# EAGLE board CT_schematic (EAGLE 7.6.0)

Size 100 x 80 mm. Coordinates in mm from the lower left corner, seen from the top.
Outline: 0,0 100,0 100,80 0,80 0,0
Copper layers (1*16): Top 0.035mm / dielectric 1.5mm / Bottom 0.035mm
Design rules "default": minimum track width 10mil, minimum drill 24mil, track to track 8mil, track to pad 8mil, pad to pad 8mil, via to via 8mil, smd to smd 8mil, copper to edge 40mil, drill to drill 8mil, minimum pad ring 10mil, minimum via ring 8mil, stop-mask expansion 4mil, vias tented up to drill 0mil, thermal gap 10mil

## Footprints (pad centres in the part's own frame; a part is rotated, then mirrored left to right if it is on the bottom)
C0603 = smd 0.8 x 0.8: 1 -0.762,0; 2 0.762,0
C0402 = smd 0.5 x 0.5: 1 -0.508,0; 2 0.508,0
C1210 = smd 1.2 x 2.5: 1 -1.524,0; 2 1.524,0
C0805 = smd 1.2 x 1.3: 1 -1.016,0; 2 1.016,0
EXV-9B = smd 2.718 x 1.778: 1 -2.108,0; 2 2.108,0
R0603 = smd 0.8 x 0.8: 1 -0.762,0; 2 0.762,0
EXV-9H = smd 3.505 x 1.676: 1 -2.857,0; 2 2.857,0
L0603 = smd 0.8 x 0.8: 1 -0.762,0; 2 0.762,0
PJ-037B_PACKAGE = drill 3.7 square: 1 12,0 | drill 3.2 square: 2 6,0
UFBGA169 = smd 0.35 x 0.35: A1 -3.9,3.9; A2 -3.25,3.9; A3 -2.6,3.9; A4 -1.95,3.9; A5 -1.3,3.9; A6 -0.65,3.9; A7 0,3.9; A8 0.65,3.9; A9 1.3,3.9; A10 1.95,3.9; A11 2.6,3.9; A12 3.25,3.9; A13 3.9,3.9; B1 -3.9,3.25; B2 -3.25,3.25; B3 -2.6,3.25; B4 -1.95,3.25; B5 -1.3,3.25; B6 -0.65,3.25; B7 0,3.25; B8 0.65,3.25; B9 1.3,3.25; B10 1.95,3.25; B11 2.6,3.25; B12 3.25,3.25; B13 3.9,3.25; C1 -3.9,2.6; C2 -3.25,2.6; C3 -2.6,2.6; C4 -1.95,2.6; C5 -1.3,2.6; C6 -0.65,2.6; C7 0,2.6; C8 0.65,2.6; C9 1.3,2.6; C10 1.95,2.6; C11 2.6,2.6; C12 3.25,2.6; C13 3.9,2.6; D1 -3.9,1.95; D2 -3.25,1.95; D3 -2.6,1.95; D4 -1.95,1.95; D5 -1.3,1.95; D6 -0.65,1.95; D7 0,1.95; D8 0.65,1.95; D9 1.3,1.95; D10 1.95,1.95; D11 2.6,1.95; D12 3.25,1.95; D13 3.9,1.95; E1 -3.9,1.3; E2 -3.25,1.3; E3 -2.6,1.3; E4 -1.95,1.3; E5 -1.3,1.3; E6 -0.65,1.3; E7 0,1.3; E8 0.65,1.3; E9 1.3,1.3; E10 1.95,1.3; E11 2.6,1.3; E12 3.25,1.3; E13 3.9,1.3; F1 -3.9,0.65; F2 -3.25,0.65; F3 -2.6,0.65; F4 -1.95,0.65; F5 -1.3,0.65; F6 -0.65,0.65; F7 0,0.65; F8 0.65,0.65; F9 1.3,0.65; F10 1.95,0.65; F11 2.6,0.65; F12 3.25,0.65; F13 3.9,0.65; G1 -3.9,0; G2 -3.25,0; G3 -2.6,0; G4 -1.95,0; G5 -1.3,0; G6 -0.65,0; G7 0,0; G8 0.65,0; G9 1.3,0; G10 1.95,0; G11 2.6,0; G12 3.25,0; G13 3.9,0; H1 -3.9,-0.65; H2 -3.25,-0.65; H3 -2.6,-0.65; H4 -1.95,-0.65; H5 -1.3,-0.65; H6 -0.65,-0.65; H7 0,-0.65; H8 0.65,-0.65; H9 1.3,-0.65; H10 1.95,-0.65; H11 2.6,-0.65; H12 3.25,-0.65; H13 3.9,-0.65; J1 -3.9,-1.3; J2 -3.25,-1.3; J3 -2.6,-1.3; J4 -1.95,-1.3; J5 -1.3,-1.3; J6 -0.65,-1.3; J7 0,-1.3; J8 0.65,-1.3; J9 1.3,-1.3; J10 1.95,-1.3; J11 2.6,-1.3; J12 3.25,-1.3; J13 3.9,-1.3; K1 -3.9,-1.95; K2 -3.25,-1.95; K3 -2.6,-1.95; K4 -1.95,-1.95; K5 -1.3,-1.95; K6 -0.65,-1.95; K7 0,-1.95; K8 0.65,-1.95; K9 1.3,-1.95; K10 1.95,-1.95; K11 2.6,-1.95; K12 3.25,-1.95; K13 3.9,-1.95; L1 -3.9,-2.6; L2 -3.25,-2.6; L3 -2.6,-2.6; L4 -1.95,-2.6; L5 -1.3,-2.6; L6 -0.65,-2.6; L7 0,-2.6; L8 0.65,-2.6; L9 1.3,-2.6; L10 1.95,-2.6; L11 2.6,-2.6; L12 3.25,-2.6; L13 3.9,-2.6; M1 -3.9,-3.25; M2 -3.25,-3.25; M3 -2.6,-3.25; M4 -1.95,-3.25; M5 -1.3,-3.25; M6 -0.65,-3.25; M7 0,-3.25; M8 0.65,-3.25; M9 1.3,-3.25; M10 1.95,-3.25; M11 2.6,-3.25; M12 3.25,-3.25; M13 3.9,-3.25; N1 -3.9,-3.9; N2 -3.25,-3.9; N3 -2.6,-3.9; N4 -1.95,-3.9; N5 -1.3,-3.9; N6 -0.65,-3.9; N7 0,-3.9; N8 0.65,-3.9; N9 1.3,-3.9; N10 1.95,-3.9; N11 2.6,-3.9; N12 3.25,-3.9; N13 3.9,-3.9
M10382 = smd 1 x 1: 1 0,0; 2 -1.6,0; 3 -3.2,0; 4 -3.2,-2; 5 -3.2,-3.6; 6 -3.2,-5.2; 7 -3.2,-6.8; 8 -3.2,-8.4; 9 -3.2,-10; 10 -3.2,-11.6; 11 -3.2,-13.2; 12 -3.2,-14.8; 13 -3.2,-16.4; 14 -3.2,-18; 15 -3.2,-19.6; 16 -3.2,-21.2; 17 -3.2,-22.8; 18 -0.55,-22.8; 19 1.05,-22.8; 20 2.65,-22.8; 21 5.3,-22.8; 22 5.3,-21.2; 23 5.3,-19.6; 24 5.3,-18; 25 5.3,-16.4; 26 5.3,-14.8; 27 5.3,-13.2; 28 5.3,-11.6; 29 5.3,-10; 30 5.3,-8.4; 31 5.3,-6.8; 32 5.3,-5.2; 33 5.3,-3.6; 34 5.3,-2; 35 5.3,0; 36 3.7,0
SOIC-8 = smd 1.6 x 0.6: 1 -2.7,1.905 | smd 1.55 x 0.6: 2 -2.7,0.635; 3 -2.7,-0.635; 4 -2.7,-1.905; 5 2.7,-1.905; 6 2.7,-0.635; 7 2.7,0.635; 8 2.7,1.905
182-009-MALE = drill 1.194 pad 1.524 octagon: 1 -5.537,10.923; 2 -2.769,10.923; 3 0,10.923; 4 2.769,10.923; 5 5.537,10.923; 6 -4.153,8.08; 7 -1.384,8.08; 8 1.384,8.08; 9 4.153,8.08 | hole 3.048: -12.446,9.501; 12.446,9.501
PC28F512P33BFD = smd 0.45 x 0.45: A1 0,0; A2 1,0; A3 2,0; A4 3,0; A5 4,0; A6 5,0; A7 6,0; A8 7,0; B1 0,-1; B2 1,-1; B3 2,-1; B4 3,-1; B5 4,-1; B6 5,-1; B7 6,-1; B8 7,-1; C1 0,-2; C2 1,-2; C3 2,-2; C4 3,-2; C5 4,-2; C6 5,-2; C7 6,-2; C8 7,-2; D1 0,-3; D2 1,-3; D3 2,-3; D4 3,-3; D5 4,-3; D6 5,-3; D7 6,-3; D8 7,-3; E1 0,-4; E2 1,-4; E3 2,-4; E4 3,-4; E5 4,-4; E6 5,-4; E7 6,-4; E8 7,-4; F1 0,-5; F2 1,-5; F3 2,-5; F4 3,-5; F5 4,-5; F6 5,-5; F7 6,-5; F8 7,-5; G1 0,-6; G2 1,-6; G3 2,-6; G4 3,-6; G5 4,-6; G6 5,-6; G7 6,-6; G8 7,-6; H1 0,-7; H2 1,-7; H3 2,-7; H4 3,-7; H5 4,-7; H6 5,-7; H7 6,-7; H8 7,-7
QFN-24 = smd 0.7 x 0.305: 1 -1.815,1.25; 2 -1.815,0.75; 3 -1.815,0.25; 4 -1.815,-0.25; 5 -1.815,-0.73; 6 -1.815,-1.25; 13 1.815,-1.25; 14 1.815,-0.75; 15 1.815,-0.25; 16 1.815,0.25; 17 1.815,0.75; 18 1.815,1.25 | smd 0.305 x 0.7: 7 -1.25,-1.815; 8 -0.75,-1.815; 9 -0.25,-1.815; 10 0.25,-1.815; 11 0.75,-1.815; 12 1.25,-1.815; 19 1.25,1.815; 20 0.75,1.815; 21 0.25,1.815; 22 -0.25,1.815; 23 -0.75,1.815; 24 -1.25,1.815 | smd 2.591 x 2.591: 25 0,0
FCI_10118193-0001LF = smd 0.4 x 1.35: 1 -1.3,2.675; 2 -0.65,2.675; 3 0,2.675; 4 0.65,2.675; 5 1.3,2.675 | smd 1.6 x 1.4: 6 -3.2,2.45; 7 3.2,2.45 | smd 1.9 x 1.9: 8 -1.2,0; 9 1.2,0 | hole 0.5: -3.3,0; 3.3,0
SOT143B = smd 1 x 0.7: 1 -0.75,-1 | smd 0.6 x 0.7: 2 0.95,-1; 3 0.95,1; 4 -0.95,1
QFN-28 = smd 0.813 x 0.305: 1 -2.451,1.5; 2 -2.451,1; 3 -2.451,0.5; 4 -2.451,0; 5 -2.451,-0.5; 6 -2.451,-1; 7 -2.451,-1.5; 15 2.451,-1.5; 16 2.451,-1; 17 2.451,-0.5; 18 2.451,0; 19 2.451,0.5; 20 2.451,1; 21 2.451,1.5 | smd 0.305 x 0.813: 8 -1.5,-2.451; 9 -1,-2.451; 10 -0.5,-2.451; 11 0,-2.451; 12 0.5,-2.451; 13 1,-2.451; 14 1.5,-2.451; 22 1.5,2.451; 23 1,2.451; 24 0.5,2.451; 25 0,2.451; 26 -0.5,2.451; 27 -1,2.451; 28 -1.5,2.451 | smd 3.607 x 3.607: 29 0,0
SJ-43515TS-SMT-TR = smd 2.2 x 3: 1 0.6,-7.4; 4 3.4,-7.4 | smd 3 x 3: 2 12.8,-7.4; 5 17,-3 | smd 2 x 3: 3 5.3,0; 6 2.5,0 | drill 1.8: P$7 4.5,-3.69; P$8 11.54,-3.69
ABLS-25.000MHZ-B2F-T = smd 5.6 x 2.8: 1 -3.81,0; 2 5.69,0
ABLS-12.288MHZ-B4-T = smd 5.6 x 2.8: 1 -3.81,0; 2 5.69,0
ASEK = smd 1.4 x 1: 1 -1.1,-0.8; 2 1.1,-0.8; 3 1.1,0.8; 4 -1.1,0.8
ASFL1 = smd 1.7 x 1.5: 1 -1.27,-1.1; 2 1.27,-1.1; 3 1.27,1.1; 4 -1.27,1.1
LP2954 = smd 1.6 x 0.6: 1 -2.475,1.905 | smd 1.55 x 0.6: 2 -2.475,0.635; 3 -2.475,-0.635; 4 -2.475,-1.905; 5 2.475,-1.905; 6 2.475,-0.635; 7 2.475,0.635; 8 2.475,1.905
WSON-8 = smd 0.3 x 0.6: 1 -0.75,0; 2 0.05,0; 3 0.85,0; 4 1.65,0; 5 1.65,3.8; 6 0.85,3.8; 7 0.05,3.8; 8 -0.75,3.8 | smd 3 x 2.6: PAD 0.45,1.9
SON-6 = smd 0.55 x 0.3: 1 -0.355,0.5 | smd 0.52 x 0.3: 2 -0.37,0; 3 -0.37,-0.5; 4 0.37,-0.5; 5 0.37,0; 6 0.37,0.5
SW_4-1437565-2 = smd 1.4 x 2.1: 1 -2.23,4.55; 2 -2.23,-4.55; 3 2.23,4.55; 4 2.23,-4.55
LGM67K-G1J2-24-Z = smd 0.8 x 1.4: A -2,0; C 0,0
NC7SZ125M5X = smd 1.3 x 0.7: 1 -1.3,0.95; 2 -1.3,0; 3 -1.3,-0.95; 4 1.3,-0.95; 5 1.3,0.95

## Placement (x,y rotation side)
C1  1e-06  [C0603]  -30.48,91.44 0 top  (outside the outline)
C2  1e-07  [C0603]  -34.29,91.44 0 top  (outside the outline)
C3  1e-07  [C0603]  -38.1,91.44 0 top  (outside the outline)
C4  1e-07  [C0603]  -41.91,91.44 0 top  (outside the outline)
C5  1e-07  [C0603]  -45.72,91.44 0 top  (outside the outline)
C6  1e-07  [C0603]  -49.53,91.44 0 top  (outside the outline)
C7  1e-07  [C0603]  -53.34,91.44 0 top  (outside the outline)
C8  1e-07  [C0603]  -57.15,91.44 0 top  (outside the outline)
C9  1e-07  [C0603]  -60.96,91.44 0 top  (outside the outline)
C10  1e-07  [C0603]  -64.77,91.44 0 top  (outside the outline)
C11  1e-07  [C0603]  -68.58,91.44 0 top  (outside the outline)
C12  1e-07  [C0603]  -72.39,91.44 0 top  (outside the outline)
C13  1e-07  [C0603]  -76.2,91.44 0 top  (outside the outline)
C14  1e-07  [C0603]  -80.01,91.44 0 top  (outside the outline)
C15  1e-07  [C0603]  -83.82,91.44 0 top  (outside the outline)
C16  1e-07  [C0603]  -87.63,91.44 0 top  (outside the outline)
C17  4.7e-06  [C0603]  -15.24,91.44 0 top  (outside the outline)
C18  2.2e-06  [C0603]  -19.05,91.44 0 top  (outside the outline)
C19  2.2e-06  [C0603]  -22.86,91.44 0 top  (outside the outline)
C20  1e-08  [C0603]  -91.44,91.44 0 top  (outside the outline)
C21  1e-06  [C0603]  -15.24,96.52 0 top  (outside the outline)
C22  1e-07  [C0603]  -19.05,96.52 0 top  (outside the outline)
C23  1e-11  [C0402]  -22.86,101.6 0 top  (outside the outline)
C24  1e-11  [C0402]  -26.67,101.6 0 top  (outside the outline)
C25  2.2e-11  [C0402]  -88.9,96.52 0 top  (outside the outline)
C26  2.2e-11  [C0402]  -92.71,96.52 0 top  (outside the outline)
C27  1e-06  [C0603]  -22.86,96.52 0 top  (outside the outline)
C28  1e-06  [C0603]  -26.67,96.52 0 top  (outside the outline)
C29  1e-07  [C0402]  -30.48,101.6 0 top  (outside the outline)
C30  1e-08  [C0402]  -34.29,101.6 0 top  (outside the outline)
C31  1e-07  [C0402]  -38.1,101.6 0 top  (outside the outline)
C32  1e-08  [C0402]  -41.91,101.6 0 top  (outside the outline)
C33  1e-07  [C0402]  -45.72,101.6 0 top  (outside the outline)
C34  1e-08  [C0402]  -49.53,101.6 0 top  (outside the outline)
C35  1e-08  [C0402]  -53.34,101.6 0 top  (outside the outline)
C36  2.2e-06  [C0603]  -26.67,91.44 0 top  (outside the outline)
C37  1e-08  [C0402]  -57.15,101.6 0 top  (outside the outline)
C38  1e-08  [C0402]  -60.96,101.6 0 top  (outside the outline)
C39  1e-06  [C0603]  -30.48,96.52 0 top  (outside the outline)
C40  2.2e-05  [C1210]  -45.72,74.93 0 top  (outside the outline)
C41  2.2e-05  [C1210]  -52.07,74.93 0 top  (outside the outline)
C42  1e-09  [C0402]  -64.77,101.6 0 top  (outside the outline)
C43  1e-09  [C0402]  -68.58,101.6 0 top  (outside the outline)
C44  1e-07  [C0402]  -72.39,101.6 0 top  (outside the outline)
C45  1e-07  [C0402]  -76.2,101.6 0 top  (outside the outline)
C46  1e-07  [C0402]  -80.01,101.6 0 top  (outside the outline)
C47  1e-07  [C0402]  -83.82,101.6 0 top  (outside the outline)
C48  1e-07  [C0402]  -87.63,101.6 0 top  (outside the outline)
C49  1e-05  [C0805]  -34.29,81.28 0 top  (outside the outline)
C50  1e-05  [C0805]  -39.37,81.28 0 top  (outside the outline)
C51  1e-05  [C0805]  -44.45,81.28 0 top  (outside the outline)
C52  1e-05  [C0805]  -49.53,81.28 0 top  (outside the outline)
C53  1e-05  [C0805]  -54.61,81.28 0 top  (outside the outline)
C54  2.2e-11  [C0402]  -15.24,101.6 0 top  (outside the outline)
C55  2.2e-11  [C0402]  -19.05,101.6 0 top  (outside the outline)
C56  1e-08  [C0402]  -91.44,101.6 0 top  (outside the outline)
C57  1e-08  [C0402]  -15.24,106.68 0 top  (outside the outline)
C58  1e-06  [EXV-9B]  -78.74,73.66 0 top  (outside the outline)
C59  2.2e-06  [EXV-9B]  -87.63,73.66 0 top  (outside the outline)
C60  1e-08  [C0402]  -19.05,106.68 0 top  (outside the outline)
C61  1e-05  [C1210]  -58.42,74.93 0 top  (outside the outline)
C62  1e-05  [C1210]  -64.77,74.93 0 top  (outside the outline)
C63  8e-07  [R0603]  -34.29,96.52 0 top  (outside the outline)
C64  1e-05  [C1210]  -71.12,74.93 0 top  (outside the outline)
C65  1e-07  [C0402]  -22.86,106.68 0 top  (outside the outline)
C66  0.0001  [EXV-9H]  -38.1,67.31 0 top  (outside the outline)
C67  0.0001  [EXV-9H]  -49.53,67.31 0 top  (outside the outline)
C68  1e-08  [C0402]  -26.67,106.68 0 top  (outside the outline)
C69  1e-08  [C0402]  -30.48,106.68 0 top  (outside the outline)
C70  1e-08  [C0402]  -34.29,106.68 0 top  (outside the outline)
F1  240.0  [L0603]  -38.1,96.52 0 top  (outside the outline)
J1  PJ-037B  [PJ-037B_PACKAGE]  -83.82,33.02 0 top  (outside the outline)
R2  1000.0  [R0603]  -41.91,96.52 0 top  (outside the outline)
R4  4700.0  [R0603]  -45.72,96.52 0 top  (outside the outline)
R5  4700.0  [R0603]  -49.53,96.52 0 top  (outside the outline)
R6  4700.0  [R0603]  -53.34,96.52 0 top  (outside the outline)
R7  2200.0  [R0603]  -57.15,96.52 0 top  (outside the outline)
R8  2200.0  [R0603]  -60.96,96.52 0 top  (outside the outline)
R9  10000.0  [R0603]  -25.4,86.36 0 top  (outside the outline)
R10  10000.0  [R0603]  -30.48,86.36 0 top  (outside the outline)
R11  10000.0  [R0603]  -35.56,86.36 0 top  (outside the outline)
R12  120.0  [R0603]  -64.77,96.52 0 top  (outside the outline)
R13  10000.0  [R0603]  -40.64,86.36 0 top  (outside the outline)
R14  10000.0  [R0603]  -45.72,86.36 0 top  (outside the outline)
R15  10000.0  [R0603]  -50.8,86.36 0 top  (outside the outline)
R16  10000.0  [R0603]  -55.88,86.36 0 top  (outside the outline)
R17  10000.0  [R0603]  -60.96,86.36 0 top  (outside the outline)
R18  8060.0  [R0603]  -68.58,96.52 0 top  (outside the outline)
R19  47000.0  [R0603]  -66.04,86.36 0 top  (outside the outline)
R20  47000.0  [R0603]  -71.12,86.36 0 top  (outside the outline)
R21  47000.0  [R0603]  -76.2,86.36 0 top  (outside the outline)
R22  680.0  [R0603]  -72.39,96.52 0 top  (outside the outline)
R23  100000.0  [R0603]  -59.69,81.28 0 top  (outside the outline)
R24  100000.0  [R0603]  -64.77,81.28 0 top  (outside the outline)
R25  47000.0  [R0603]  -81.28,86.36 0 top  (outside the outline)
R26  100000.0  [R0603]  -69.85,81.28 0 top  (outside the outline)
R27  100000.0  [R0603]  -74.93,81.28 0 top  (outside the outline)
R28  2231.0  [R0603]  -76.2,96.52 0 top  (outside the outline)
R29  1000.0  [R0603]  -80.01,96.52 0 top  (outside the outline)
R30  100000.0  [R0603]  -80.01,81.28 0 top  (outside the outline)
R31  300000.0  [R0603]  -85.09,81.28 0 top  (outside the outline)
R32  100000.0  [R0603]  -90.17,81.28 0 top  (outside the outline)
R33  10000.0  [R0603]  -86.36,86.36 0 top  (outside the outline)
R34  10000.0  [R0603]  -91.44,86.36 0 top  (outside the outline)
R35  9100.0  [R0603]  -83.82,96.52 0 top  (outside the outline)
R36  680000.0  [R0603]  -15.24,86.36 0 top  (outside the outline)
R37  120000.0  [R0603]  -20.32,86.36 0 top  (outside the outline)
U1  STM32F469AGH6  [UFBGA169]  -73.66,7.62 0 top  (outside the outline)
U2  M10382  [M10382]  -19.05,24.13 0 top  (outside the outline)
U3  MCP2562-E/SN  [SOIC-8]  -74.93,45.72 0 top  (outside the outline)
U4  182-009-113R531  [182-009-MALE]  -46.99,6.35 0 top  (outside the outline)
U5  PC28F512P33BFD  [PC28F512P33BFD]  -27.94,50.8 0 top  (outside the outline)
U6  USB3317C-CP-TR  [QFN-24]  -38.1,74.93 0 top  (outside the outline)
U7  10118193-0001LF  [FCI_10118193-0001LF]  -73.66,57.15 0 top  (outside the outline)
U8  prtr5v0u2ax  [SOT143B]  -46.99,106.68 0 top  (outside the outline)
U9  WM8731CLSEFL  [QFN-28]  -30.48,74.93 0 top  (outside the outline)
U10  SJ-43515TS-SMT-TR  [SJ-43515TS-SMT-TR]  -39.37,35.56 0 top  (outside the outline)
U11  SJ-43515TS-SMT-TR  [SJ-43515TS-SMT-TR]  -67.31,35.56 0 top  (outside the outline)
U12  ABLS-25.000MHZ-B2F-T  [ABLS-25.000MHZ-B2F-T]  -68.58,67.31 0 top  (outside the outline)
U13  ABLS-12.288MHZ-B4-T  [ABLS-12.288MHZ-B4-T]  -88.9,67.31 0 top  (outside the outline)
U14  ASEK-32.768KHz-ECST  [ASEK]  -29.21,67.31 0 top  (outside the outline)
U15  ASFL1-26MHZ-NCS  [ASFL1]  -64.77,58.42 0 top  (outside the outline)
U16  LP2954AIMX/NOPB  [LP2954]  -60.96,45.72 0 top  (outside the outline)
U17  LP3878SDX-ADJ/NOPB  [WSON-8]  -30.48,55.88 0 top  (outside the outline)
U18  LP2951ACSDX/NOPB  [WSON-8]  -48.26,55.88 0 top  (outside the outline)
U19  TPS3895ADRYR  [SON-6]  -50.8,105.41 0 top  (outside the outline)
U20  4-1437565-2  [SW_4-1437565-2]  -44.45,46.99 0 top  (outside the outline)
U21  Q65110A2395  [LGM67K-G1J2-24-Z]  -17.78,74.93 0 top  (outside the outline)
U22  nc7sz125m5x  [NC7SZ125M5X]  -15.24,80.01 0 top  (outside the outline)
U23  nc7sz125m5x  [NC7SZ125M5X]  -21.59,80.01 0 top  (outside the outline)
U24  nc7sz125m5x  [NC7SZ125M5X]  -27.94,80.01 0 top  (outside the outline)

## Library data of the parts
C1-C70 F1 J1 R2 R4-R37 U1-U24 = circuit_tree

## Nets
CLK_CRYSTAL_U1_G1: C23.1 U1.G1 U12.1
CLK_CRYSTAL_U1_G2: C24.1 U1.G2 U12.2
CLK_CRYSTAL_U9_1: C54.1 U9.1 U13.1
CLK_CRYSTAL_U9_2: C55.1 U9.2 U13.2
CLK_U1_E1: U1.E1 U14.3
CLK_U6_23: U6.23 U15.3
GND: C1.2 C2.2 C3.2 C4.2 C5.2 C6.2 C7.2 C8.2 C9.2 C10.2 C11.2 C12.2 C13.2 C14.2 C15.2 C16.2 C17.2 C18.2 C19.2 C20.2 C21.2 C22.2 C23.2 C24.2 C25.2 C26.2 C27.2 C28.2 C29.2 C30.2 C31.2 C32.2 C33.2 C34.2 C35.2 C36.2 C37.2 C38.2 C39.2 C43.2 C44.2 C45.2 C46.2 C47.2 C48.2 C49.2 C50.2 C51.2 C52.2 C53.2 C54.2 C55.2 C56.2 C57.2 C58.2 C59.2 C60.2 C61.2 C62.2 C63.2 C64.2 C65.2 C66.2 C67.2 C68.2 C69.2 C70.2 J1.2 R2.2 R11.2 R18.2 R19.2 R20.2 R21.2 R26.2 R29.2 R32.2 R35.2 R37.2 U1.D11 U1.E3 U1.F5 U1.F8 U1.G7 U1.G9 U1.H11 U1.J1 U1.J2 U1.J6 U1.J7 U1.J10 U1.K11 U1.M9 U2.2 U2.4 U2.14 U2.17 U2.21 U2.24 U2.26 U2.28 U2.33 U2.34 U2.35 U2.36 U3.2 U3.8 U4.5 U5.B2 U5.H2 U5.H4 U5.H6 U6.25 U7.5 U7.6 U7.7 U7.8 U7.9 U8.1 U9.4 U9.15 U9.19 U9.25 U9.26 U9.29 U10.1 U11.1 U14.2 U15.2 U16.4 U17.3 U17.PAD U18.3 U18.4 U18.PAD U19.2 U21.C U22.1 U22.3 U23.1 U23.3 U24.1 U24.3
NET_U1_A5: R10.1 U1.A5
NET_U1_C3: R9.1 U1.C3
NET_U1_C4: R8.1 U1.C4 U2.18
NET_U1_C5: R7.1 U1.C5 U2.19
NET_U1_D12: C19.1 U1.D12
NET_U1_H2: R5.1 U1.H2 U23.4
NET_U1_J3: C20.1 C21.1 F1.1 U1.J3
NET_U1_J11: U1.J11
NET_U1_K12: U1.K12
NET_U1_L5: R11.1 U1.L5
NET_U1_N9: C18.1 U1.N9
NET_U1_N12: U21.A
NET_U1_N13: U20.3 U20.4
NET_U3_6: R12.2 U3.6
NET_U4_2: R12.2 U3.6 U4.2
NET_U4_3: R12.1 U3.7 U4.3
NET_U5_A4: C33.1 C34.1 U5.A4
NET_U5_C6: R16.1 U5.C6
NET_U5_D4: R4.1 U5.D4 U22.4
NET_U6_4: C36.1 U6.4
NET_U6_22: R6.1 U6.22 U24.4
NET_U6_24: R18.1 U6.24
NET_U7_1: C39.1 U6.2 U7.1 U8.4
NET_U7_2: U6.5 U7.2 U8.3
NET_U7_3: U6.6 U7.3 U8.2
NET_U9_9: U9.9
NET_U9_20: C48.1 C53.1 U9.20
NET_U10_2: C41.1 R20.1 U10.2
NET_U10_5: C40.1 R19.1 U10.5
NET_U10_13: C40.2
NET_U10_14: C41.2
NET_U11_5: C42.1 C43.1 R21.1 R22.1 U11.5
NET_U11_21: R22.2
NET_U11_22: C42.2
NET_U16_3: R24.1 U16.3
NET_U16_5: R23.1 U16.5
NET_U16_7: R25.2 R26.1 U16.7
NET_U17_1: C60.1 U17.1
NET_U17_6: R28.2 R29.1 U17.6
NET_U17_8: R27.1 U17.8
NET_U18_5: R30.1 U18.5
NET_U18_7: R31.2 R32.1 U18.7
NET_U19_1: R34.1 R35.1 U19.1
NET_U19_3: R36.2 R37.1 U19.3
NET_U19_4: R33.1 U19.4 U22.2 U23.2 U24.2
NET_U20_1: R2.1 U20.1 U20.2
PROC_CAN1_RX: U1.A13 U3.4
PROC_CAN1_TX: U1.A12 U3.1
PROC_FMC_A0: U1.F3 U5.A1
PROC_FMC_A1: U1.G3 U5.B1
PROC_FMC_A2: U1.G5 U5.C1
PROC_FMC_A3: U1.H4 U5.D1
PROC_FMC_A4: U1.L4 U5.D2
PROC_FMC_A5: U1.H3 U5.A2
PROC_FMC_A6: U1.N5 U5.C2
PROC_FMC_A7: U1.M4 U5.A3
PROC_FMC_A8: U1.H5 U5.B3
PROC_FMC_A9: U1.M6 U5.C3
PROC_FMC_A10: U1.N6 U5.D3
PROC_FMC_A11: U1.M7 U5.C4
PROC_FMC_A12: U1.F13 U5.A5
PROC_FMC_A13: U1.F12 U5.B5
PROC_FMC_A14: U1.E13 U5.C5
PROC_FMC_A15: U1.E12 U5.D7
PROC_FMC_A16: U1.M11 U5.D8
PROC_FMC_A17: U1.M13 U5.A7
PROC_FMC_A18: U1.M12 U5.B7
PROC_FMC_A19: U1.C1 U5.C7
PROC_FMC_A20: U1.C2 U5.C8
PROC_FMC_A21: U1.D1 U5.A8
PROC_FMC_A22: U1.D2 U5.G1
PROC_FMC_A23: U1.B2 U5.H8
PROC_FMC_A24: U1.A6 U5.B6
PROC_FMC_CLK: U1.C8 U5.E6
PROC_FMC_D0: U1.L12 U5.F2
PROC_FMC_D1: U1.L13 U5.E2
PROC_FMC_D2: U1.C9 U5.G3
PROC_FMC_D3: U1.C7 U5.E4
PROC_FMC_D4: U1.N7 U5.E5
PROC_FMC_D5: U1.G6 U5.G5
PROC_FMC_D6: U1.H6 U5.G6
PROC_FMC_D7: U1.H7 U5.H7
PROC_FMC_D8: U1.K7 U5.E1
PROC_FMC_D9: U1.L7 U5.E3
PROC_FMC_D10: U1.J8 U5.F3
PROC_FMC_D11: U1.K8 U5.F4
PROC_FMC_D12: U1.L8 U5.F5
PROC_FMC_D13: U1.L10 U5.H5
PROC_FMC_D14: U1.M10 U5.G7
PROC_FMC_D15: U1.L11 U5.E7
PROC_FMC_NE2: R14.1 U1.E6 U5.B4
PROC_FMC_NL: R13.1 U1.B4 U5.F6
PROC_FMC_NOE: R15.1 U1.C6 U5.F8
PROC_FMC_NWAIT: U1.D7 U5.F7
PROC_FMC_NWE: R17.1 U1.B7 U5.G8
PROC_I2S2_CK: U1.C11 U9.7
PROC_I2S2_EXT_SD: U1.B12 U9.10
PROC_I2S2_SD: U1.B10 U9.8
PROC_I2S2_WS: U1.B13 U9.9 U9.11
PROC_USB_OTG_HS_ULPI_CK: U1.M3 U6.12
PROC_USB_OTG_HS_ULPI_D0: U1.K3 U6.16
PROC_USB_OTG_HS_ULPI_D1: U1.N4 U6.15
PROC_USB_OTG_HS_ULPI_D2: U1.K5 U6.14
PROC_USB_OTG_HS_ULPI_D3: U1.M8 U6.13
PROC_USB_OTG_HS_ULPI_D4: U1.N8 U6.11
PROC_USB_OTG_HS_ULPI_D5: U1.N10 U6.10
PROC_USB_OTG_HS_ULPI_D6: U1.N11 U6.9
PROC_USB_OTG_HS_ULPI_D7: U1.D5 U6.8
PROC_USB_OTG_HS_ULPI_DIR: U1.F2 U6.19
PROC_USB_OTG_HS_ULPI_NXT: U1.M2 U6.18
PROC_USB_OTG_HS_ULPI_STP: U1.M1 U6.20
VCC_S1_12V0: C58.1 C61.1 C63.1 C66.1 C67.1 J1.1 R24.2 R27.2 U16.8 U17.4 U18.8
VCC_TIER1_1V8: C25.1 C26.1 C38.1 C44.1 C46.1 C47.1 C49.1 C51.1 C52.1 C59.1 C68.1 C69.1 C70.1 R23.2 R25.1 U2.5 U2.25 U2.27 U6.21 U9.5 U9.12 U9.18 U16.1 U22.5 U23.5 U24.5
VCC_TIER1_3V3: C1.1 C2.1 C3.1 C4.1 C5.1 C6.1 C7.1 C8.1 C9.1 C10.1 C11.1 C12.1 C13.1 C14.1 C15.1 C16.1 C17.1 C22.1 C28.1 C29.1 C30.1 C31.1 C32.1 C35.1 C37.1 C45.1 C50.1 C56.1 C57.1 C62.1 C65.1 F1.2 R4.2 R5.2 R6.2 R7.2 R8.2 R9.2 R10.2 R13.2 R14.2 R15.2 R16.2 R17.2 R28.1 R33.2 R34.2 R36.1 U1.D3 U1.D10 U1.E5 U1.F4 U1.F7 U1.G8 U1.G11 U1.J4 U1.K6 U1.K10 U1.K13 U1.L6 U1.L9 U3.5 U5.A6 U5.D5 U5.D6 U5.G4 U5.H3 U6.3 U6.17 U9.3 U14.4 U15.4 U17.5 U19.6
VCC_TIER1_5V0: C27.1 C64.1 R30.2 R31.1 U3.3 U18.1

## Tracks (layer width: path | path; a pad name or v marks a point on that pad's centre or on a via)
CLK_CRYSTAL_U1_G1  (2 unrouted)
CLK_CRYSTAL_U1_G2  (2 unrouted)
CLK_CRYSTAL_U9_1  (2 unrouted)
CLK_CRYSTAL_U9_2  (2 unrouted)
CLK_U1_E1  (1 unrouted)
CLK_U6_23  (1 unrouted)
GND  (142 unrouted)
NET_U1_A5  (1 unrouted)
NET_U1_C3  (1 unrouted)
NET_U1_C4  (2 unrouted)
NET_U1_C5  (2 unrouted)
NET_U1_D12  (1 unrouted)
NET_U1_H2  (2 unrouted)
NET_U1_J3  (3 unrouted)
NET_U1_L5  (1 unrouted)
NET_U1_N9  (1 unrouted)
NET_U1_N13  (1 unrouted)
NET_U3_6  (1 unrouted)
NET_U4_2  (2 unrouted)
NET_U4_3  (2 unrouted)
NET_U5_A4  (2 unrouted)
NET_U5_C6  (1 unrouted)
NET_U5_D4  (2 unrouted)
NET_U6_4  (1 unrouted)
NET_U6_22  (2 unrouted)
NET_U6_24  (1 unrouted)
NET_U7_1  (3 unrouted)
NET_U7_2  (2 unrouted)
NET_U7_3  (2 unrouted)
NET_U9_20  (2 unrouted)
NET_U10_2  (2 unrouted)
NET_U10_5  (2 unrouted)
NET_U11_5  (4 unrouted)
NET_U16_3  (1 unrouted)
NET_U16_5  (1 unrouted)
NET_U16_7  (2 unrouted)
NET_U17_1  (1 unrouted)
NET_U17_6  (2 unrouted)
NET_U17_8  (1 unrouted)
NET_U18_5  (1 unrouted)
NET_U18_7  (2 unrouted)
NET_U19_1  (2 unrouted)
NET_U19_3  (2 unrouted)
NET_U19_4  (4 unrouted)
NET_U20_1  (2 unrouted)
PROC_CAN1_RX  (1 unrouted)
PROC_CAN1_TX  (1 unrouted)
PROC_FMC_A0  (1 unrouted)
PROC_FMC_A1  (1 unrouted)
PROC_FMC_A2  (1 unrouted)
PROC_FMC_A3  (1 unrouted)
PROC_FMC_A4  (1 unrouted)
PROC_FMC_A5  (1 unrouted)
PROC_FMC_A6  (1 unrouted)
PROC_FMC_A7  (1 unrouted)
PROC_FMC_A8  (1 unrouted)
PROC_FMC_A9  (1 unrouted)
PROC_FMC_A10  (1 unrouted)
PROC_FMC_A11  (1 unrouted)
PROC_FMC_A12  (1 unrouted)
PROC_FMC_A13  (1 unrouted)
PROC_FMC_A14  (1 unrouted)
PROC_FMC_A15  (1 unrouted)
PROC_FMC_A16  (1 unrouted)
PROC_FMC_A17  (1 unrouted)
PROC_FMC_A18  (1 unrouted)
PROC_FMC_A19  (1 unrouted)
PROC_FMC_A20  (1 unrouted)
PROC_FMC_A21  (1 unrouted)
PROC_FMC_A22  (1 unrouted)
PROC_FMC_A23  (1 unrouted)
PROC_FMC_A24  (1 unrouted)
PROC_FMC_CLK  (1 unrouted)
PROC_FMC_D0  (1 unrouted)
PROC_FMC_D1  (1 unrouted)
PROC_FMC_D2  (1 unrouted)
PROC_FMC_D3  (1 unrouted)
PROC_FMC_D4  (1 unrouted)
PROC_FMC_D5  (1 unrouted)
PROC_FMC_D6  (1 unrouted)
PROC_FMC_D7  (1 unrouted)
PROC_FMC_D8  (1 unrouted)
PROC_FMC_D9  (1 unrouted)
PROC_FMC_D10  (1 unrouted)
PROC_FMC_D11  (1 unrouted)
PROC_FMC_D12  (1 unrouted)
PROC_FMC_D13  (1 unrouted)
PROC_FMC_D14  (1 unrouted)
PROC_FMC_D15  (1 unrouted)
PROC_FMC_NE2  (2 unrouted)
PROC_FMC_NL  (2 unrouted)
PROC_FMC_NOE  (2 unrouted)
PROC_FMC_NWAIT  (1 unrouted)
PROC_FMC_NWE  (2 unrouted)
PROC_I2S2_CK  (1 unrouted)
PROC_I2S2_EXT_SD  (1 unrouted)
PROC_I2S2_SD  (1 unrouted)
PROC_I2S2_WS  (2 unrouted)
PROC_USB_OTG_HS_ULPI_CK  (1 unrouted)
PROC_USB_OTG_HS_ULPI_D0  (1 unrouted)
PROC_USB_OTG_HS_ULPI_D1  (1 unrouted)
PROC_USB_OTG_HS_ULPI_D2  (1 unrouted)
PROC_USB_OTG_HS_ULPI_D3  (1 unrouted)
PROC_USB_OTG_HS_ULPI_D4  (1 unrouted)
PROC_USB_OTG_HS_ULPI_D5  (1 unrouted)
PROC_USB_OTG_HS_ULPI_D6  (1 unrouted)
PROC_USB_OTG_HS_ULPI_D7  (1 unrouted)
PROC_USB_OTG_HS_ULPI_DIR  (1 unrouted)
PROC_USB_OTG_HS_ULPI_NXT  (1 unrouted)
PROC_USB_OTG_HS_ULPI_STP  (1 unrouted)
VCC_S1_12V0  (10 unrouted)
VCC_TIER1_1V8  (25 unrouted)
VCC_TIER1_3V3  (73 unrouted)
VCC_TIER1_5V0  (5 unrouted)